# Altium PCB LoraEp.PcbDoc
Units mm, origin at the board's own origin, x right, y up, seen from the top; angles counter-clockwise.
Board outline 100 x 67 mm, 2 copper layers (Top Layer, Bottom Layer); 40 components, 72 nets, 156 pads, 11 vias.
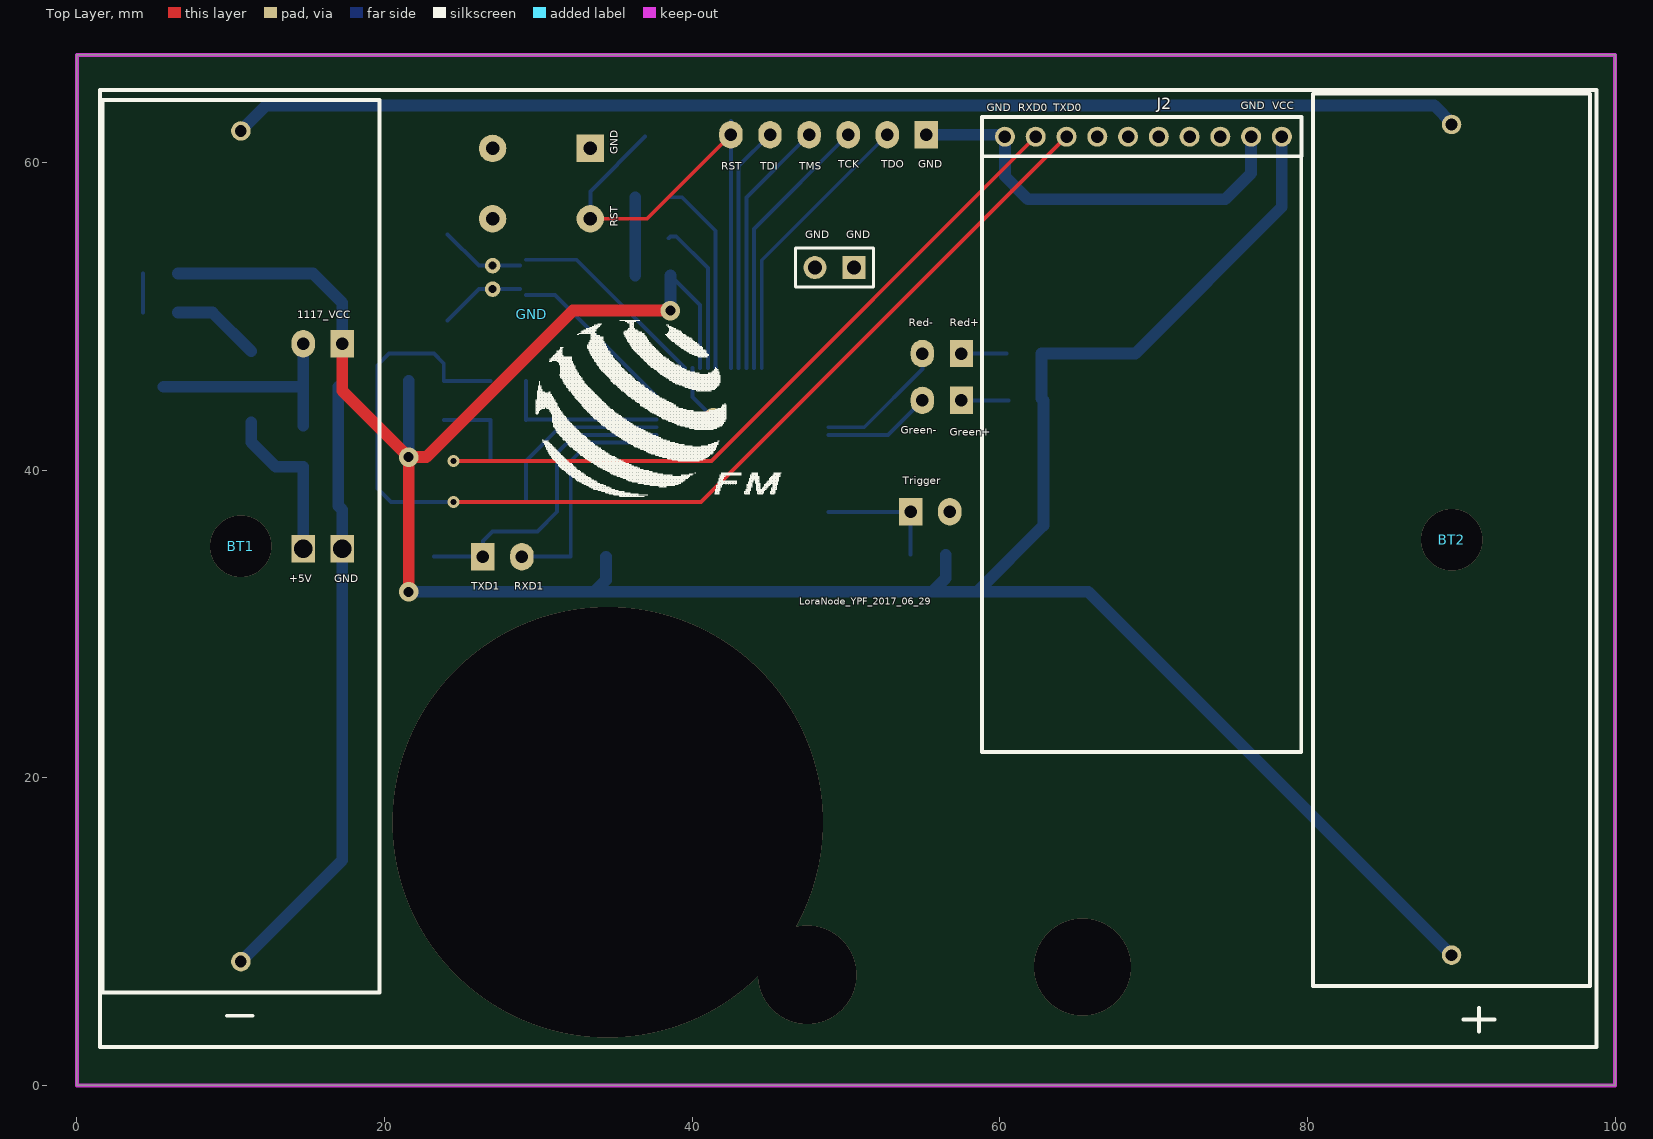
[diagram p0: Top Layer view]
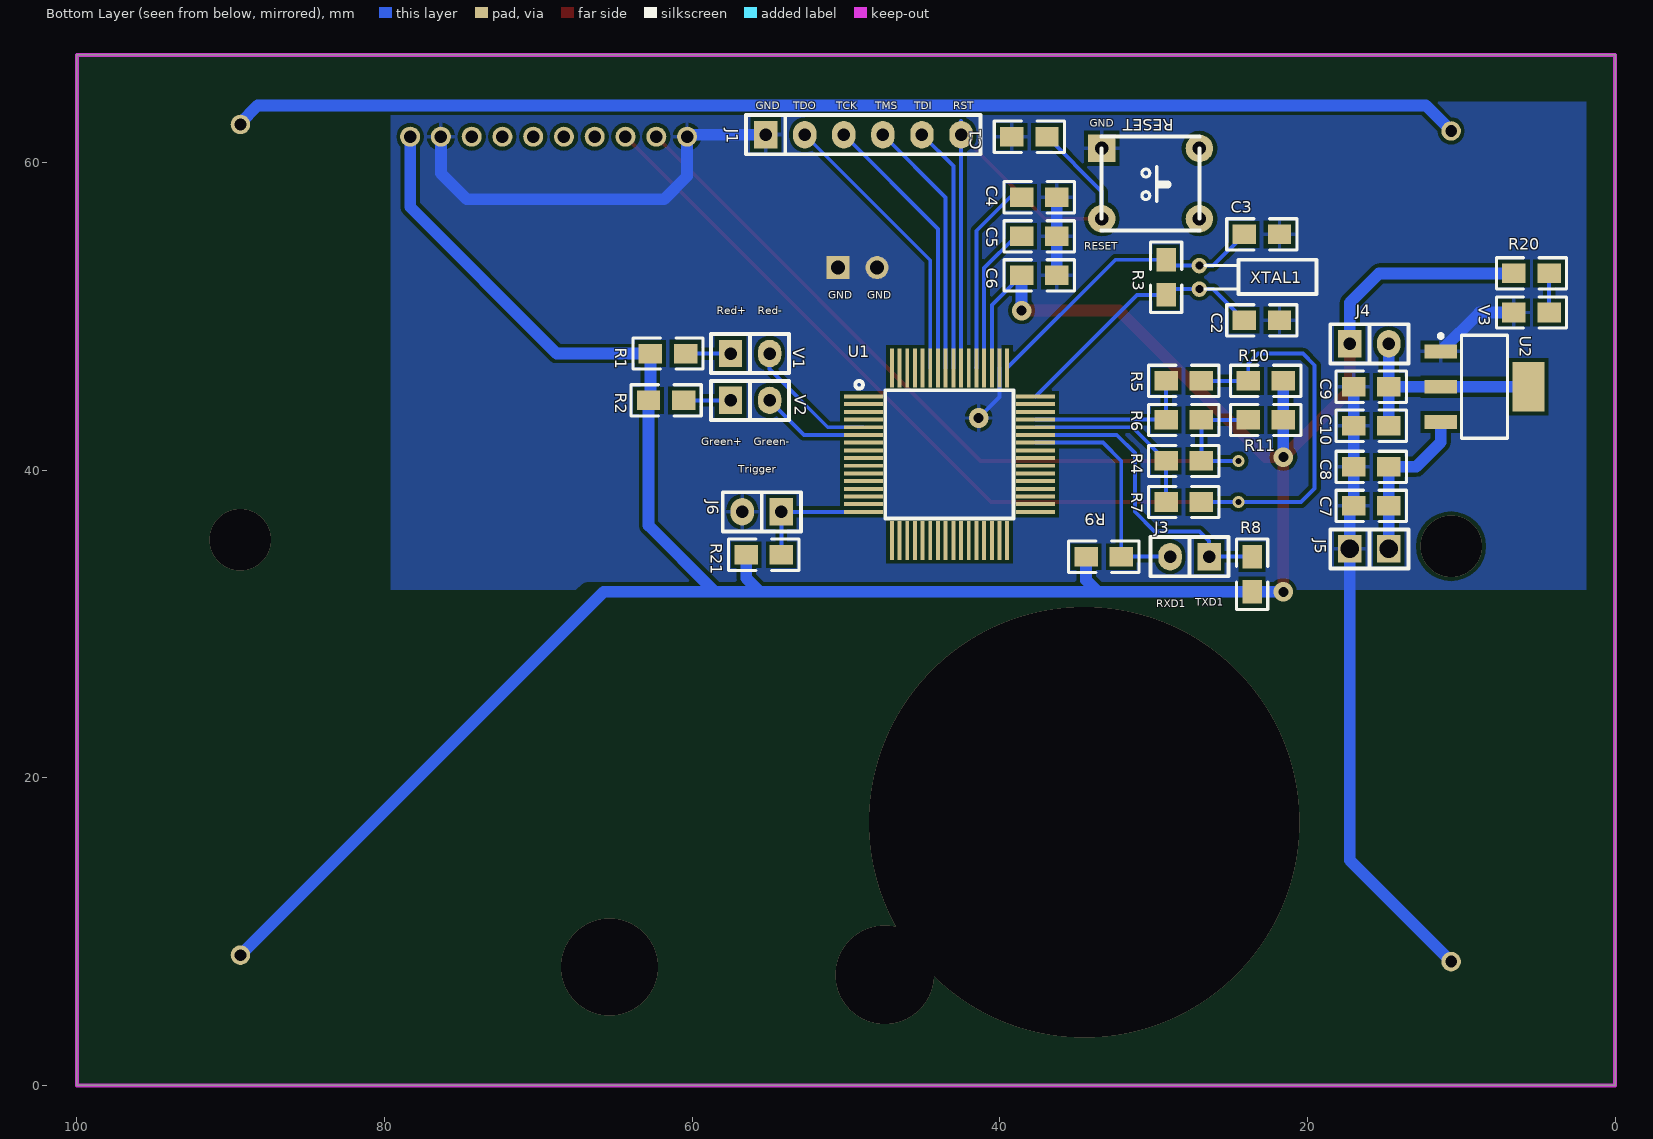
[diagram p1: Bottom Layer view, seen from below]

## Layer stack, top to bottom
Top Layer: signal copper 0.0356
Dielectric: dielectric 0.32, FR-4, Dk 4.8
Bottom Layer: signal copper 0.0356

## Board outline
0,0 0,67 100,67 100,0 0,0

## Design rules (kind name [scope] priority, off if disabled: settings)
Clearance [All] p1: gap=0.203
MinimumSolderMaskSliver [All] p1 off: minsoldermaskwidth=0.152
PolygonConnect [All] p1: connectstyle=Relief reliefconductorwidth=0.254 reliefentries=4 polygonreliefangle="90 Angle"
RoutingVias [All] p1: holewidth=0.711 width=1.27 viastyle="Through Hole" minholewidth=0.254 minwidth=0.508 maxholewidth=0.711 maxwidth=1.27
SilkToSilkClearance [All] p1 off: silktosilkclearance=0.254
SilkscreenOverComponentPads [All] p1 off: minsilkscreentomaskgap=0.254
SolderMaskExpansion [All] p1: expansion=0.102
Width [All] p1: maxlimit=1.27 minlimit=0.254 preferedwidth=0.254
25 further rules are at their usual default settings.

## Components (designator, comment, footprint, x,y, rotation, side; value= is the part's Value field where it differs from the comment)
BT1 "Battery" BAT 19.661,6.056 r0 top locked
BT2 "Battery" BAT 80.367,64.476 r180 top
C1 "1uF" 0805 36.933,61.682 r0 bottom
C2 "Cap" 0805 24.106,49.744 r180 bottom
C3 "Cap" 0805 24.106,55.332 r180 bottom
C4 "3.3nF" 0805 36.298,57.745 r0 bottom
C5 "100nF" 0805 36.298,55.205 r0 bottom
C6 "100nF" 0805 36.298,52.665 r0 bottom
C7 "10uF" 0805 14.708,37.679 r0 bottom
C8 "0.1uF" 0805 16.994,40.219 r180 bottom
C9 "10uF" 0805 14.708,45.426 r0 bottom
C10 "0.1uF" 0805 16.994,42.886 r180 bottom
GND "CON2" HDR1X2 50.522,53.173 r180 top (schematic designator J7)
GND "Comment" FMSH-LOGO-1 29.567,50.125 r0 top
J1 "CON6" SIP6 55.221,61.809 r180 bottom
J2 "CON10" SSIP10 78.335,61.682 r180 top locked
J3 "CON2" SIP2 27.662,34.377 r0 bottom
J4 "CON2" SIP2 15.978,48.22 r180 bottom
J5 "CON2" SourPad 15.978,34.885 r180 bottom
J6 "CON2" SIP2 55.475,37.298 r0 bottom
R1 "1K" 0805 62.714,47.585 r180 bottom
R2 "1K" 0805 62.841,44.537 r180 bottom
R3 "10M" 0805 29.186,53.681 r270 bottom
R4 "0" 0805 29.186,40.6 r180 bottom
R5 "0" 0805 29.186,45.807 r180 bottom
R6 "0" 0805 29.186,43.267 r180 bottom
R7 "0" 0805 29.186,37.933 r180 bottom
R8 "1K" 0805 23.598,34.377 r270 bottom
R9 "1K" 0805 32.107,34.377 r0 bottom
R10 "1K" 0805 23.852,45.807 r180 bottom
R11 "1K" 0805 23.852,43.267 r180 bottom
R20 "1K" 0805 6.58,52.792 r180 bottom
R21 "10K" 0805 54.205,34.504 r0 bottom
RESET "KEY" BUTTON-S 27.027,60.92 r270 bottom
U1 "FM375" LQFP64-0.5 48.871,44.791 r180 bottom
U2 "LM1117MP-3.3" MP04A_L 8.485,45.426 r180 bottom
V1 "LED" SIP2 56.237,47.585 r180 bottom
V2 "LED" SIP2 56.237,44.537 r180 bottom
V3 "LED" 0805 4.294,50.252 r0 bottom
XTAL1 "32K" XTAL-RB32K_2 27.027,53.3 r270 bottom

## Footprints (in the part's own frame and the unit in brackets; to place one, negate y for a bottom-side part, rotate by r counter-clockwise, add the part's x,y. Pads: shape width x height; smd on the part's side, far side on the other; paste and mask are expansions set on the pad)
0805 [mil]
  rect 60x50 smd: 1(0,0) 2(90,0)
  silkscreen extent -45,-40 135,40
BAT [mm]
  round 1.27 hole 0.762: 1(-9,56) 2(-9,2)
  silkscreen extent -18,0 0,58
BUTTON-S [mil]
  rect 70x70 hole 35: 1(0,-250)
  round 70 hole 35: 2(180,-250) 3(0,0) 4(180,0)
  silkscreen extent -30,-250 210,0
FMSH-LOGO-1 [mm]
  silkscreen extent 0.3,-11.8 16.23,-0.37
HDR1X2 [mm] "Connector; Header; 2 Position"
  rect 1.5x1.5 hole 0.9: 1(0,0)
  round 1.5 hole 0.9: 2(2.54,0)
  silkscreen extent -1.27,-1.27 3.81,1.27
LQFP64-0.5 [mm]
  rect 2.54x0.254 smd: 1(0,0) 2(0,-0.5) 3(0,-1) 4(0,-1.5) 5(0,-2) 6(0,-2.5) 7(0,-3) 8(0,-3.5) 9(0,-4) 10(0,-4.5) 11(0,-5) 12(0,-5.5) 13(0,-6) 14(0,-6.5) 15(0,-7) 16(0,-7.5) 33(11.2,-7.5) 34(11.2,-7) 35(11.2,-6.5) 36(11.2,-6) 37(11.2,-5.5) 38(11.2,-5) 39(11.2,-4.5) 40(11.2,-4) 41(11.2,-3.5) 42(11.2,-3) 43(11.2,-2.5) 44(11.2,-2) 45(11.2,-1.5) 46(11.2,-1) 47(11.2,-0.5) 48(11.2,0)
  rect 0.254x2.54 smd: 17(1.85,-9.35) 18(2.35,-9.35) 19(2.85,-9.35) 20(3.35,-9.35) 21(3.85,-9.35) 22(4.35,-9.35) 23(4.85,-9.35) 24(5.35,-9.35) 25(5.85,-9.35) 26(6.35,-9.35) 27(6.85,-9.35) 28(7.35,-9.35) 29(7.85,-9.35) 30(8.35,-9.35) 31(8.85,-9.35) 32(9.35,-9.35) 49(9.35,1.85) 50(8.85,1.85) 51(8.35,1.85) 52(7.85,1.85) 53(7.35,1.85) 54(6.85,1.85) 55(6.35,1.85) 56(5.85,1.85) 57(5.35,1.85) 58(4.85,1.85) 59(4.35,1.85) 60(3.85,1.85) 61(3.35,1.85) 62(2.85,1.85) 63(2.35,1.85) 64(1.85,1.85)
  silkscreen extent -0.53,-7.92 9.75,1.01
MP04A_L [mm] "SOT223, 4-Leads, Body 6.5x3.5mm, Pitch 2.3mm, Lead Span 7mm, IPC High Density"
  rect 2.1x0.9 smd: 1(-2.85,2.3) 2(-2.85,0) 3(-2.85,-2.3)
  rect 2.1x3.2 smd: 4(2.85,0)
  silkscreen extent -2.98,-3.35 1.5,3.42, body extent -1.85,-3.35 1.85,3.35, height 1.8
SIP2 [mil]
  rect 60x70 hole 32: 1(-50,0)
  oval 60x70 hole 32: 2(50,0)
  silkscreen extent -100,-50 100,50
SIP6 [mil]
  rect 60x70 hole 32: 1(0,0)
  oval 60x70 hole 32: 2(100,0) 3(200,0) 4(300,0) 5(400,0) 6(500,0)
  silkscreen extent -50,-50 550,50
SourPad [mil]
  rect 60x70 hole 47.24: 1(-50,0) 2(50,0)
  silkscreen extent -100,-50 100,50
SSIP10 [mm]
  round 1.3 hole 0.813: 1(0,0) 2(2,0) 3(4,0) 4(6,0) 5(8,0) 6(10,0) 7(12,0) 8(14,0) 9(16,0) 10(18,0)
  silkscreen extent -1.27,-1.27 19.5,40.01
XTAL-RB32K_2 [mil]
  round 40 hole 20: 1(0,0) 2(60,0)
  silkscreen extent -15,14 73,300

## Part data
BT1 BT2: "Multicell Battery"
C1: library part CAP, "һ?"
C2 C3: "Capacitor"
C4 C5 C6 C8 C10: library part Cap, "Capacitor"
C7 C9: library part "Cap Pol1", "Polarized Capacitor (Radial)"
GND J1 J2 J3 J4 J5 J6: "Connector"
R1 R2 R4 R5 R6 R7 R8 R9 R10 R11 R20 R21: library part RES1, "电阻"
R3: library part RES1
RESET: library part SW-PB, "ƹ?"
U1: library part LQFP64-JJ
U2: "800mA Low-Dropout Linear Regulator"
XTAL1: library part CRYSTAL, "Crystal"

## Via types
v1: diameter 1.27, hole 0.635, Top Layer to Bottom Layer, 4 vias
v2: diameter 0.762, hole 0.381, Top Layer to Bottom Layer, 2 vias
v3: diameter 4, hole 4, Top Layer to Bottom Layer, 2 vias
v4: diameter 28, hole 28, Top Layer to Bottom Layer, 1 vias
v5: diameter 6.3, hole 6.3, Top Layer to Bottom Layer, 1 vias
v6: diameter 6.4, hole 6.4, Top Layer to Bottom Layer, 1 vias

## Nets (pads, with @x,y where several pads share a name; then routed paths per layer and width w, separated by ;. In a path a pad name is that pad's centre, name@x,y a point inside that pad or via, vN(x,y) a via of type N, cw(c..) or ccw(c..) an arc to the next point about the centre after c; other vN are vias at no path point)
+3.3: C9.1 C10.2 J4.2 U2.2 U2.4 | length 14.4
  Bottom Layer w0.762: U2.4 U2.2 C9.1 ; C10.2 C9.1 ; J4.2 C9.1
+5: C7.1 C8.2 J5.2 U2.3 | length 10.7
  Bottom Layer w0.762: U2.3 11.335,41.814 12.93,40.219 C8.2 C7.1 J5.2
BD_TCK: J1.3 U1.58 | length 17.7
  Bottom Layer w0.254: U1.58 44.021,55.689 J1.3
BD_TDI: J1.5 U1.56 | length 16
  Bottom Layer w0.254: U1.56 43.021,59.769 J1.5
BD_TDO: J1.2 U1.59 | length 18.5
  Bottom Layer w0.254: U1.59 44.521,53.649 J1.2
BD_TMS: J1.4 U1.57 | length 16.9
  Bottom Layer w0.254: U1.57 43.521,57.729 J1.4
CPLL: C4.2 U1.53 | length 12.8
  Bottom Layer w0.254: C4.2 39.346,57.745 41.521,55.57 U1.53 U1.53@41.564,46.684
GND: BT1.2 C1.2 C2.2 C3.2 C4.1 C5.1 C6.1 C7.2 C8.1 C9.2 C10.1 GND.1 GND.2 J1.1 J2.2 J2.10 J5.1 J6.2 RESET.1 U1.50 U2.1 V3.2 | length 82.2
  Bottom Layer w0.254: U1.50 40.021,44.751 v1(41.378,43.394)
  Bottom Layer w0.762: V3.2 8.809,50.252 U2.1 ; BT1.2 17.248,14.643 J5.1 17.248,37.425 C7.2 C8.1 C10.1 C9.2 ; C6.1 C5.1 C4.1 ; J1.1 J2.10@60.208,61.809 ; J2.10 60.335,59.108 61.825,57.618 74.652,57.618 76.335,59.301 J2.2
NetBT1_1: BT1.1 BT2.2 | length 79.9
  Bottom Layer w0.762: BT1.1 12.319,63.714 88.241,63.714 BT2.2@89.423,62.532
NetR1_2: R1.2 V1.1 | length 3
  Bottom Layer w0.254: V1.1@57.38,47.585 R1.2
NetR2_2: R2.2 V2.1 | length 3
  Bottom Layer w0.254: V2.1 R2.2
NetR20_2: R20.2 V3.1 | length 2.5
  Bottom Layer w0.254: V3.1 R20.2
PA0: U1.1
PA1: U1.2
PA2: U1.3
PA3: U1.4
PA4: U1.5 V1.2 | length 8.7
  Bottom Layer w0.254: U1.5 51.189,42.791 54.967,46.569 V1.2
PA5: U1.6 V2.2 | length 7
  Bottom Layer w0.254: U1.6 52.721,42.291 V2.2
PA6: U1.7
PA7: U1.8
PB0: U1.9
PB1: U1.10
PB2: U1.11
PB3: U1.12
PB4: U1.13
PB5: U1.14
PB6: U1.15
PB7: J6.1 R21.1 U1.16 | length 8.1
  Bottom Layer w0.254: U1.16 J6.1@54.198,37.291 ; R21.1 J6.1
PC0: U1.17
PC1: U1.18
PC2: U1.19
PC3: U1.20
PC4: U1.21
PC5: U1.22
PC6: U1.23
PC7: U1.24
PD0: U1.25
PD1: U1.26
PD2: U1.27
PD3: U1.28
PD4: U1.29
PD5: U1.30
PD6: U1.31
PD7: U1.32
PE0: U1.33
PE1: U1.34
PE2: U1.35
PE3: U1.36
PE4: U1.37
PE5: U1.38
PE6: U1.39
PE7: U1.40
PF0: U1.41
PF1: J3.2 R9.1 U1.42 | length 15.5
  Bottom Layer w0.254: J3.2 R9.1 32.107,40.6 33.298,41.791 U1.42
PF2: J3.1 R8.1 U1.43 | length 20.6
  Bottom Layer w0.254: R8.1@23.217,34.377 J3.1 26.392,35.393 27.027,36.028 29.948,36.028 31.218,37.298 31.218,41.108 32.401,42.291 U1.43
PF3: R4.1 R7.1 U1.44 | length 12.1
  Bottom Layer w0.254: R7.1 R4.1 31.377,42.791 U1.44
PF4: R5.1 R6.1 U1.45 | length 11
  Bottom Layer w0.254: R5.1 R6.1 29.21,43.291 U1.45
PF5: U1.46
PF6: U1.47
PF7: U1.64
PG4: U1.60
PG5: U1.61
PG6: U1.62
PG7: U1.63
PH0: U1.54
RESET: C1.1 J1.6 RESET.2 U1.55 | length 34.3
  Top Layer w0.254: RESET.2 37.06,56.348 J1.6
  Bottom Layer w0.254: RESET.2 33.377,58.126 C1.1 ; U1.55 J1.6 42.521,62.698
RXD0: J2.9 R4.2 R6.2 R11.1 | length 54.7
  Top Layer w0.254: v2(24.487,40.6) 41.253,40.6 J2.9
  Bottom Layer w0.254: R11.1 R6.2 R4.2 v2(24.487,40.6)
TXD0: J2.8 R5.2 R7.2 R10.1 | length 74.5
  Top Layer w0.254: v2(24.487,37.933) 40.586,37.933 J2.8
  Bottom Layer w0.254: R7.2 v2(24.487,37.933) 20.423,37.933 19.534,38.822 19.534,46.823 20.296,47.585 23.217,47.585 23.852,46.95 R10.1 R5.2
VCC: BT2.1 C6.2 J2.1 J4.1 R1.1 R2.1 R8.2 R9.2 R10.2 R11.2 R20.1 R21.2 U1.51 | length 191.5
  Top Layer w0.762: J4.1 17.248,45.172 v1(21.566,40.854) ; v1(21.566,32.091) v1(21.566,40.854) ; v1(38.584,50.379) 32.234,50.379 22.709,40.854 v1(21.566,40.854)
  Bottom Layer w0.254: C6.2@38.711,52.665 C6.2 40.521,50.728 U1.51
  Bottom Layer w0.762: R20.1 15.343,52.792 17.248,50.887 J4.1 ; v1(21.566,32.091) R8.2 33.631,32.091 ; v1(21.566,40.854) R11.2 R10.2 ; R9.2 34.393,32.853 33.631,32.091 ; v1(38.584,50.379) C6.2 ; R21.2 56.491,32.98 55.602,32.091 ; R2.1@62.714,44.664 R1.1 68.81,47.585 78.335,57.11 J2.1 ; R2.1 62.841,36.409 58.523,32.091 ; BT2.1 65.752,32.091 58.523,32.091 ; 33.631,32.091 55.602,32.091 ; 55.602,32.091 58.523,32.091
VDD15: C5.2 U1.52 | length 9.8
  Bottom Layer w0.254: C5.2@38.457,55.078 C5.2@38.481,55.102 ; C5.2 38.965,55.205 41.021,53.149 U1.52
XTALIN: C2.1 R3.2 U1.48 XTAL1.2 | length 16.8
  Bottom Layer w0.254: C2.1 26.138,51.776 XTAL1.2 R3.2@28.805,51.776 ; R3.2 31.075,51.395 U1.48@37.671,44.799
XTALOUT: C3.1 R3.1 U1.49 XTAL1.1 | length 18.8
  Bottom Layer w0.254: C3.1 26.138,53.3 XTAL1.1 R3.1@28.805,53.3 ; R3.1 32.481,53.681 U1.49
pads on no net: J2.3 J2.4 J2.5 J2.6 J2.7 RESET.3 RESET.4
copper on no net:
  other v3: 10.661,35.056 89.367,35.476
  other v4: 34.52,17.105
  other v5: 65.381,7.707
  other v6: 47.474,7.199

## Polygon pours and split planes (outlines as drawn)
GND on Bottom Layer "Bottom Layer" (solid, remove dead copper, pour order 4): 1.627,63.968 1.627,32.218 79.605,32.218 79.605,63.714 79.605,64.095 79.478,63.968 1.627,63.968

## Keep-outs
Keep-Out Layer:
  the board outline again, w0.254

## Silkscreen, mask and mechanical layers (free items; w line width, h text height)
Top Overlay:
  lines w0.254: 9.755,4.532 11.406,4.532 ; 90.146,4.278 92.178,4.278 ; 91.162,3.516 91.162,5.04 ; 1.5,2.5 98.782,2.5 98.782,64.73 1.5,64.73 1.5,2.5
  text "GND" at 75.668,63.46 h0.51
  text "VCC" at 77.7,63.46 h0.51
  text "GND" at 59.158,63.333 h0.51
  text "RXD0" at 61.19,63.333 h0.51
  text "TXD0" at 63.476,63.333 h0.51
  text "GND" at 35.155,60.539 h0.51 r90
  text "TCK" at 49.506,59.65 h0.51
  text "TDO" at 52.3,59.65 h0.51
  text "GND" at 54.713,59.65 h0.51
  text "RST" at 41.886,59.523 h0.51
  text "TDI" at 44.426,59.523 h0.51
  text "TMS" at 46.966,59.523 h0.51
  text "RST" at 35.155,55.84 h0.51 r90
  text "GND" at 47.347,55.078 h0.51
  text "1117_VCC" at 14.327,49.871 h0.51
  text "Red-" at 54.078,49.363 h0.51
  text "Red+" at 56.745,49.363 h0.51
  text "Green-" at 53.57,42.378 h0.51
  text "Green+" at 56.745,42.251 h0.51
  text "Trigger" at 53.697,39.076 h0.51
  text "+5V" at 13.819,32.726 h0.51
  text "GND" at 16.74,32.726 h0.51
  text "TXD1" at 25.63,32.218 h0.51
  text "RXD1" at 28.424,32.218 h0.51
  text "LoraNode_YPF_2017_06_29" at 46.966,31.075 h0.76
Bottom Overlay:
  text "RST" at 43.029,63.46 h0.51
  text "TDI" at 45.569,63.46 h0.51
  text "TMS" at 48.109,63.46 h0.51
  text "TCK" at 50.649,63.46 h0.51
  text "TDO" at 53.443,63.46 h0.51
  text "GND" at 55.856,63.46 h0.51
  text "GND" at 34.139,62.317 h0.51
  text "RESET" at 34.52,54.316 h0.51
  text "GND" at 48.617,51.141 h0.51
  text "GND" at 51.157,51.141 h0.51
  text "Red-" at 55.729,50.125 h0.51
  text "Red+" at 58.396,50.125 h0.51
  text "Green-" at 55.983,41.616 h0.51
  text "Green+" at 59.412,41.616 h0.51
  text "Trigger" at 56.999,39.838 h0.51
  text "TXD1" at 27.281,31.202 h0.51
  text "RXD1" at 29.821,31.075 h0.51